# Altium PCB 密码球锁202061.PcbDoc (part 1 of 2)
Units mm, origin at the board's own origin, x right, y up, seen from the top; angles counter-clockwise.
Board outline 49.08 x 48.4 mm, 2 copper layers (Top, Bottom), stack 0.323 mm thick; 66 components, 39 nets, 195 pads, 129 vias.
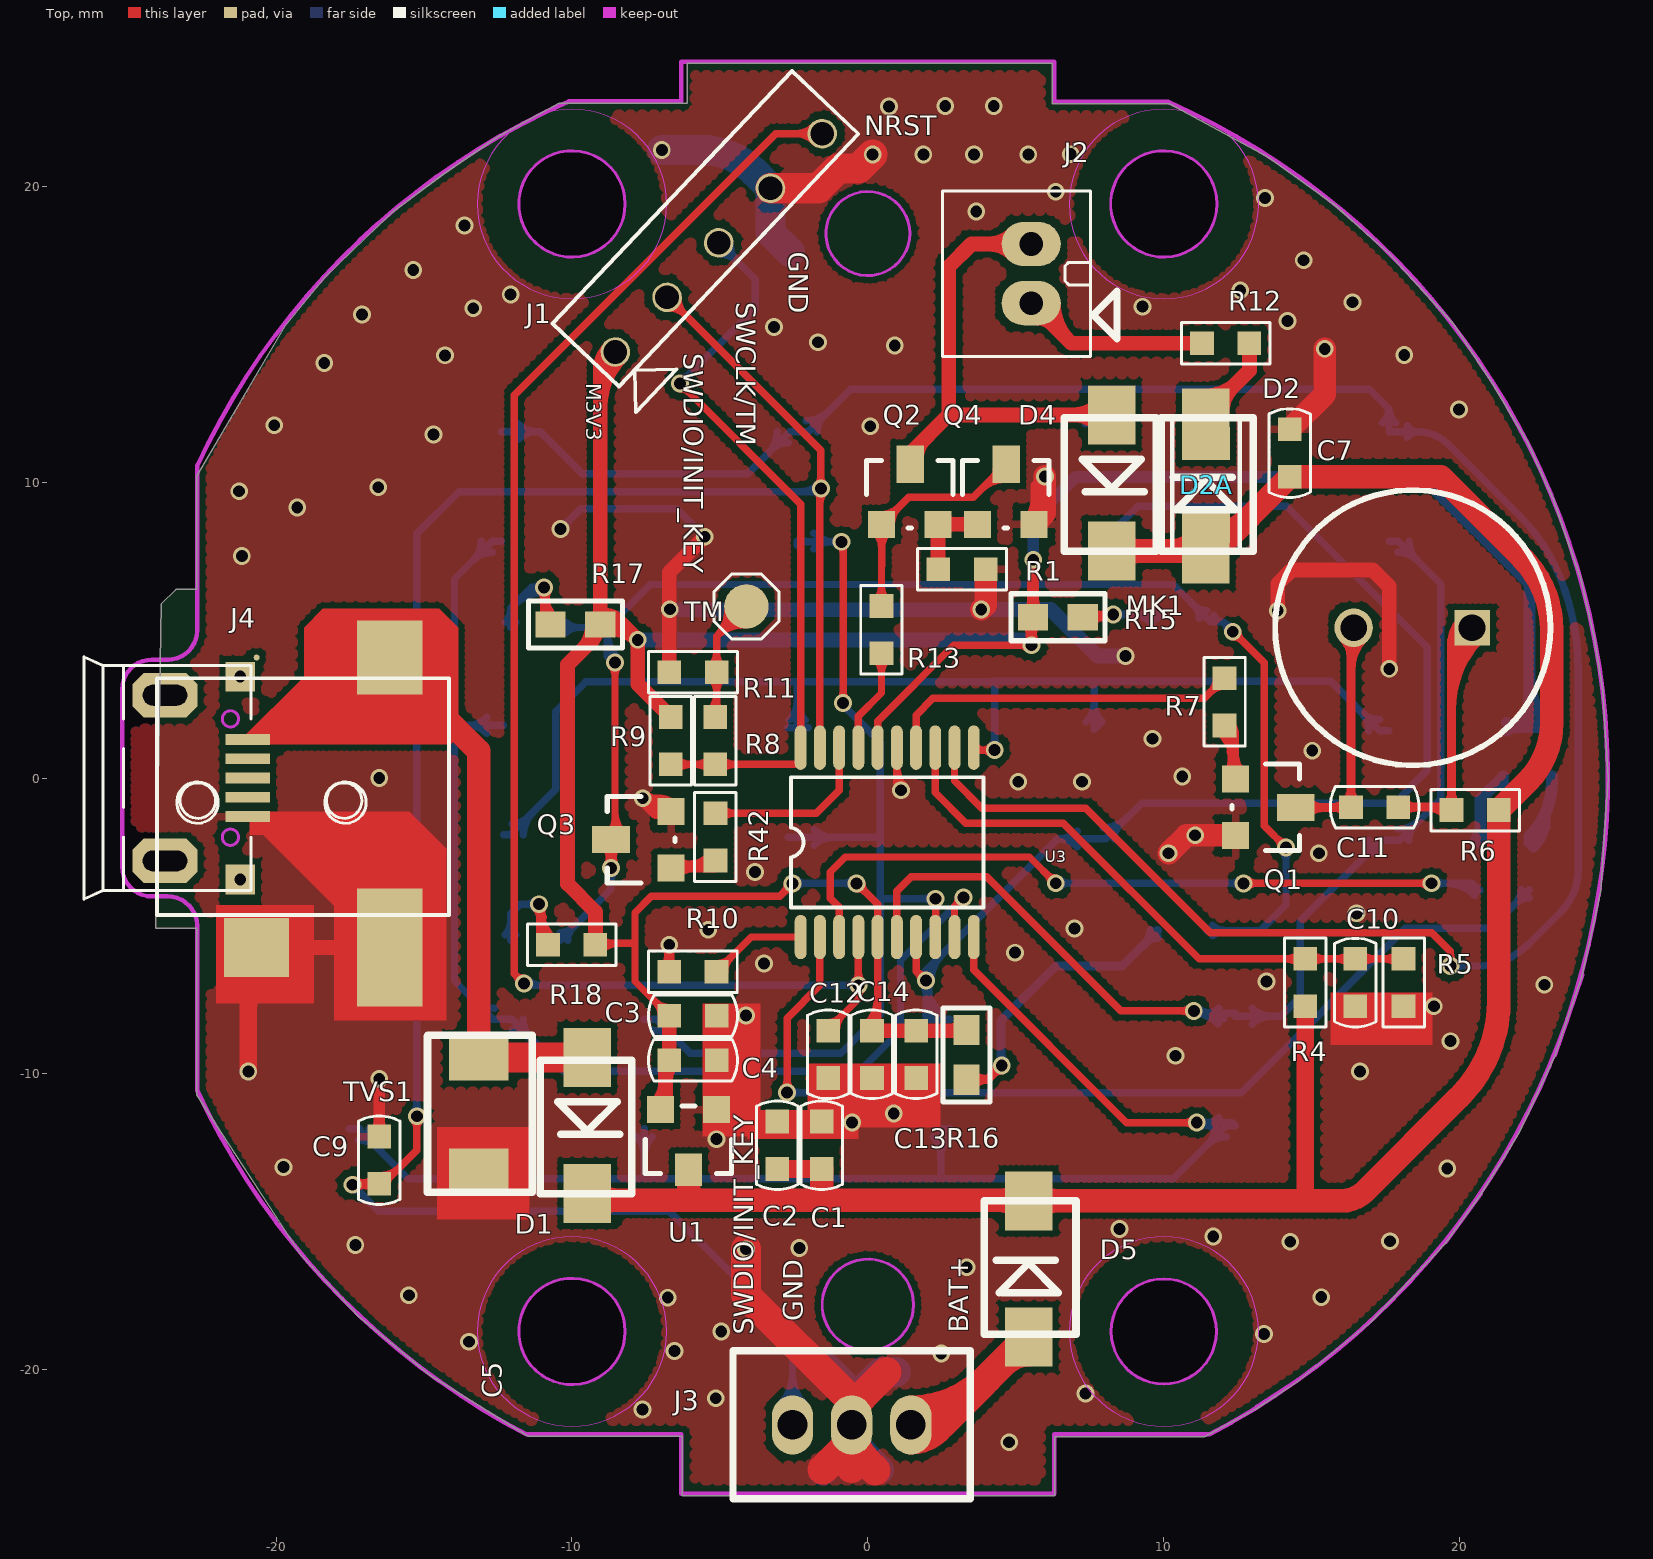
[diagram p0: Top view]
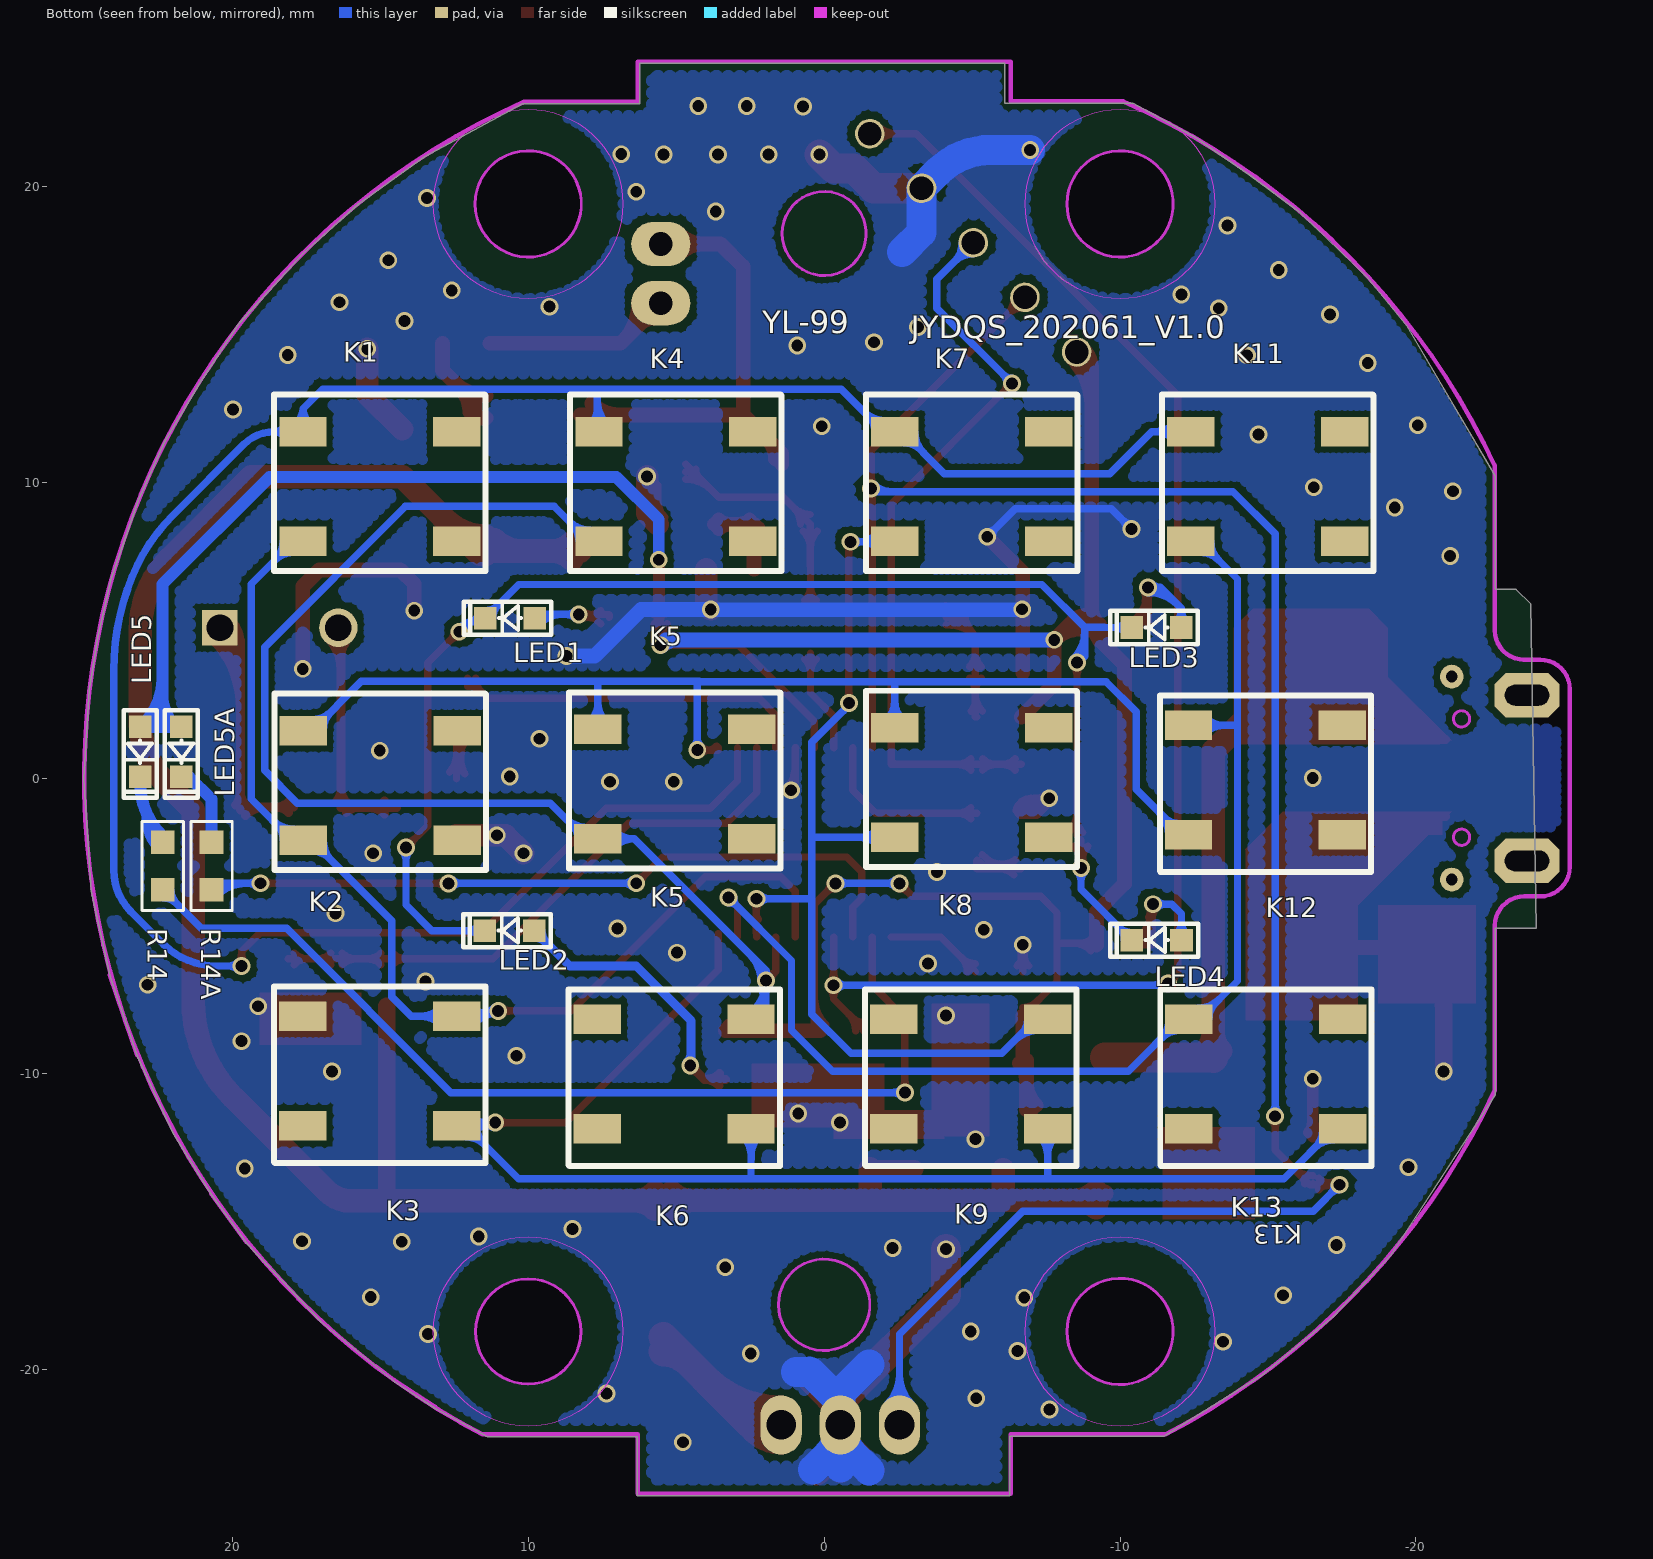
[diagram p1: Bottom view, seen from below]

## Layer stack, top to bottom
Top: signal copper 0.0343
Dielectric: dielectric 0.254, FR-4, Dk 4.3
Bottom: signal copper 0.0343

## Board outline
-6.096,24.147 6.224,24.147 6.224,22.791 10.191,22.791 13.504,20.997 15.724,19.407 17.614,17.727 19.744,15.387 21.044,13.427 22.284,11.367 23.174,9.377 24.114,6.687 24.544,4.747 24.834,2.977 25.014,-0.023 24.764,-3.823 24.124,-6.713 23.194,-9.433 21.994,-12.013 20.694,-14.093 19.484,-15.753 17.014,-18.363 14.524,-20.393 13.124,-21.313 11.374,-22.253 6.314,-22.253 6.314,-24.253 -6.276,-24.253 -6.276,-22.243 -11.486,-22.243 -14.796,-20.183 -17.206,-18.193 -19.156,-16.113 -22.682,-10.716 -22.682,-5.082 -24.066,-5.082 -23.883,5.882 -23.383,6.374 -22.682,6.374 -22.682,10.2 -19.696,15.277 -18.346,16.927 -16.096,19.097 -14.366,20.387 -12.536,21.657 -10.434,22.802 -6.096,22.802

## Design rules (kind name [scope] priority, off if disabled: settings)
Clearance Clearance_1 [InComponent('J4')] p1: gap=0.178
Clearance [All] p2: gap=0.203
ComponentClearance [All] p1: gap=0 collisioncheckmode=3 verticalgap=0 showdistances=FALSE
HoleSize [All] p1: absolutevalues=TRUE maxlimit=12.7 minlimit=0.025 maxpercent=80.000 minpercent=20.000
HoleToHoleClearance [All] p1: gap=0 allowstackedmicrovias=TRUE
MinimumSolderMaskSliver [All] p1: minsoldermaskwidth=0
PolygonConnect PolygonConnect_1 [IsVia] p1: connectstyle=Direct reliefconductorwidth=0.254 reliefentries=4 polygonreliefangle="90 Angle" airgapwidth=0.254
PolygonConnect [All] p2: connectstyle=Relief reliefconductorwidth=0.254 reliefentries=4 polygonreliefangle="90 Angle" airgapwidth=0.254
RoutingVias [All] p1: holewidth=7.112 width=12.7 viastyle="Through Hole" minholewidth=0.203 minwidth=0.254 maxholewidth=0.711 maxwidth=1.27
SilkToSilkClearance [All] p1: silktosilkclearance=0
SilkToSolderMaskClearance SilkscreenOverComponentPads [IsPad] p1: minsilkscreentomaskgap=-10 clearancetoexposedcopper=TRUE
SolderMaskExpansion [All] p1: expansion=0.102
Width [All] p1: maxlimit=2.032 minlimit=0.203 preferedwidth=0.254
22 further rules are at their usual default settings.

## Components (designator, comment, footprint, x,y, rotation, side; value= is the part's Value field where it differs from the comment)
C1 "10uF" C0603 -1.563,-12.409 r90 top
C2 "100nF" C0603 -3.057,-12.409 r90 top
C3 "10uF" C0603 -5.91,-8.032 r0 top
C4 "100nF" C0603 -5.91,-9.534 r0 top
C5 "" DC_4P_4.5 -16.155,-5.728 r90 top
C7 "100nF" C0603 14.254,10.981 r270 top
C9 "10nF" C0603 -16.515,-12.915 r90 top
C10 "10nF" C0603 16.472,-6.911 r270 top
C11 "10uF" C0603 17.124,-0.983 r0 top
C12 "100NF" C0603 -1.339,-9.337 r90 top
C13 "1UF" C0603 1.631,-9.337 r90 top
C14 "100NF" C0603 0.138,-9.337 r90 top
D1 "SS14" DO-214AC(SMA) -9.477,-9.443 r270 top
D2 "RB160" DO-214AC(SMA) 11.421,7.572 r90 top
D2A "0R" 1206R 11.43,9.906 r90 top
D4 "4148" DO-214AC(SMA) 8.244,12.272 r270 top
D5 "ss14" DO-214AC(SMA) 5.433,-18.888 r90 top
J1 "2.54mm烧录口" 5P-2.54 -8.532,14.398 r46.55 top
J2 "离合器线圈接口" 2PIN-2.0 5.518,17.047 r90 top
J3 "Header 3" 3PIN-2.0J -0.547,-21.858 r180 top
J4 "MICRO_USB" MICRO-USB_F-B -22.352,0 r270 top
K1 "SW" KEY_4_4_1.5 17.61,11.704 r180 bottom
K2 "SW" KEY_4_4_1.5 17.599,1.603 r180 bottom
K3 "SW" KEY_4_4_1.5 12.418,-11.749 r0 bottom
K4 "SW" KEY_4_4_1.5 7.61,11.704 r180 bottom
K5 "SW" KEY_4_4_1.5 7.644,1.643 r180 bottom
K6 "SW" KEY_4_4_1.5 2.469,-11.853 r0 bottom
K7 "SW" KEY_4_4_1.5 -2.39,11.704 r180 bottom
K8 "SW" KEY_4_4_1.5 -2.386,1.697 r180 bottom
K9 "SW" KEY_4_4_1.5 -7.552,-11.853 r0 bottom
K11 "SW" KEY_4_4_1.5 -12.39,11.704 r180 bottom
K12 "SW" KEY_4_4_1.5 -17.511,-1.917 r0 bottom
K13 "SW" KEY_4_4_1.5 -17.525,-11.853 r0 bottom
LED1 "blue" LED0603 10.613,5.405 r180 bottom
LED2 "blue" LED0603 10.628,-5.155 r180 bottom
LED3 "blue" LED0603 -11.233,5.088 r180 bottom
LED4 "blue" LED0603 -11.239,-5.475 r180 bottom
LED5 "GREEN" LED0603 23.114,0.889 r90 bottom
LED5A "RED" LED0603 21.717,0.889 r90 bottom
MK1 "BUZZER" BUZZER_D93_L40 18.415,5.08 r180 top
Q1 "8050" SOT-23 12.424,-0.033 r270 top
Q2 "8050" SOT-23 0.466,8.574 r0 top
Q3 "8050" SOT-23 -6.648,-3.041 r90 top
Q4 "8050" SOT-23 3.71,8.574 r0 top
R1 "0R" R0603 3.179,7.059 r0 top
R4 "2M 1%" R0603 14.782,-6.91 r270 top
R5 "1M,1%" R0603 18.102,-6.91 r90 top
R6 "51R" R0603 20.524,-1.083 r180 top
R7 "1K" R0603 12.053,2.578 r90 top
R8 "22R" R0603 -5.158,1.263 r270 top
R9 "10K" R0603 -6.659,1.263 r90 top
R10 "10K" R0603 -5.914,-6.546 r0 top
R11 "ESD" R0603 -5.911,3.571 r0 top
R12 "0R" R0603 12.092,14.695 r0 top
R13 "1k" R0603 0.46,5.014 r270 top
R14 "1K" R0603 22.348,-2.974 r90 bottom
R14A "1K" R0603 20.701,-2.974 r270 bottom
R15 "100R" R0603D 6.424,5.437 r0 top
R16 "100R" R0603D 3.33,-9.357 r270 top
R17 "100R" R0603D -9.882,5.188 r180 top
R18 "100R" R0603 -10.008,-5.638 r0 top
R42 "4.7K" R0603 -5.151,-1.988 r270 top
TM "" TP1M5 -4.103,5.799 r0 top
TVS1 "SMCJ6.0CA" SMC/DO-214AB-XIAO -13.151,-9.463 r270 top
U1 "JC5333" SOT-23-3L -6.06,-12.222 r180 top
U3 "STM32F030F4P6" TSSOP20 0.654,-2.173 r90 top

## Footprints (in the part's own frame and the unit in brackets; to place one, negate y for a bottom-side part, rotate by r counter-clockwise, add the part's x,y. Pads: shape width x height; smd on the part's side, far side on the other; paste and mask are expansions set on the pad)
2PIN-2.0 [mm]
  oval 1.5x2 hole 0.8: 1(-1,0) 2(1,0)
  silkscreen extent -2.8,-2.9 2.79,3
3PIN-2.0J [mm]
  oval 1.4x2 hole 1: 1(-2,0) 2(0,0) 3(2,0)
  silkscreen extent -4.01,-2.5 4.01,2.49
5P-2.54 [mm]
  round 1 hole 0.8: 1(0,0) 2(2.54,0) 3(5.08,0) 4(7.62,0) 5(10.16,0)
  silkscreen extent -1,-1.9 11,2.2
1206R [mil]
  rect 44x64 smd mask+1.97: 1(-55,0) 2(55,0)
  silkscreen extent -90,-45 90,45
BUZZER_D93_L40 [mm]
  rect 1.2x1.2 hole 0.9: 1(-2,0)
  round 1.3 hole 0.9: 2(2,0)
  silkscreen extent -4.65,-4.65 4.65,4.65
C0603 [mm]
  rect 0.8x0.8 smd: 1(-0.8,0) 2(0.8,0)
  silkscreen extent -1.5,-0.7 1.5,0.7
DC_4P_4.5 [mm]
  rect 4x2.2 smd: 1(0,0)
  rect 2x2.2 smd: 2(0,4.5)
  round 0.2 smd: 3(9.8,4.5)
  rect 2.5x2.2 smd: 4(9.8,0)
  silkscreen extent 1.1,-2 9.1,7.86
DO-214AC(SMA) [mm]
  rect 2x1.6 smd: 1(0,0) 2(4.6,0)
  silkscreen extent 0.1,-1.6 4.6,1.5
KEY_4_4_1.5 [mm]
  rect 1.6x1 smd: 1(0,0) 2(5.2,0) 3(0,-3.7) 4(5.2,-3.7)
  silkscreen extent -0.98,-4.71 6.17,1.25
LED0603 [mil]
  rect 30x30 smd: 1(33,0) 2(-33,0)
  silkscreen extent -62,-22 55,22
MICRO-USB_F-B [mm]
  rect 0.36x1.5 smd mask+0.05: 1(-1.3,1.4) 2(-0.65,1.4) 3(0,1.4) 4(0.65,1.4) 5(1.3,1.4)
  oct 1.5x2.2 hole 0.7 slot 1.5 at 90 deg mask+0.05: 6(2.8,-1.4) 7(-2.8,-1.4)
  rect 1x1 / inner rect 0.8x0.8 / far side round 0.8 hole 0.4 unplated: 8(3.429,1.143) 9(-3.429,1.143)
  Keep-Out Layer circle w0.1: c-2,0.813 r0.275
  Keep-Out Layer circle w0.1: c2,0.813 r0.275
  silkscreen extent -4.1,-4.14 4.1,1.5
R0603 [mm]
  rect 0.8x0.8 smd: 1(-0.8,0) 2(0.8,0)
  silkscreen extent -1.5,-0.7 1.5,0.7
R0603D [mil]
  rect 40x35 smd: 1(-33,0) 2(33,0)
  silkscreen extent -62,-31 62,31
SMC/DO-214AB-XIAO [mm]
  rect 1.5x2 smd: 1(0,0) 2(3.8,0)
  silkscreen extent -0.77,-1.73 4.54,1.81
SOT-23 [mil]
  rect 36x36 smd: 1(0,0) 2(75,0)
  rect 36x50 smd: 3(38,80)
  silkscreen extent -20,-5 95,85
SOT-23-3L [mil]
  rect 36x36 smd: 1(-37.4,-40) 2(37.4,-40)
  rect 36x43.31 smd: 3(0,40)
  silkscreen extent -57,-45 58,45
TP1M5 [mm]
  round 1.5 smd: 1(0,0)
  silkscreen extent -1.1,-1.1 1.1,1.1
TSSOP20 [mm]
  oval 1.5x0.4 smd: 1(-3.2,2.925) 2(-3.2,2.275) 3(-3.2,1.625) 4(-3.2,0.975) 5(-3.2,0.325) 6(-3.2,-0.325) 7(-3.2,-0.975) 8(-3.2,-1.625) 9(-3.2,-2.275) 10(-3.2,-2.925) 11(3.2,-2.925) 12(3.2,-2.275) 13(3.2,-1.625) 14(3.2,-0.975) 15(3.2,-0.325) 16(3.2,0.325) 17(3.2,0.975) 18(3.2,1.625) 19(3.2,2.275) 20(3.2,2.925)
  silkscreen extent -2.2,-3.25 2.2,3.25

## Part data
C1 C2 C3 C4 C7 C9 C12 C13 C14: library part "CAP NP"
C5: library part "Header 4", "Header, 2-Pin"
C10: library part C_0, "?"
C11: library part C_0_Dup1
D1 D2 D4 D5: library part D
D2A R12: library part Res0603
J1: library part "Header 5", "Header, 5-Pin"
J2: library part "Header 2", "Header, 2-Pin"
J3: "Header, 3-Pin"
K1 K2 K3 K4 K5 K6 K7 K8 K9 K11 K12 K13: "Switch"
LED1 LED2 LED3 LED4 LED5 LED5A: library part LED
MK1: library part MICROPHONE_0
Q1: library part PMBT3904_Dup1
Q2 Q4: library part NPN_BJT, "Bipolar Junction Transistor"
Q3: library part PMBT3904
R1 R8 R9 R11 R13: library part Res2, "Resistor"
R4 R5: library part R_Dup2
R6 R7 R10 R14 R14A: library part R_Dup1
R15 R16 R17 R18 R42: library part R
TM: library part TOUCH-BELL
TVS1: library part TVS
U1: library part XC6206P302M
U3: library part Component_1

## Free pads (board coordinates)
  round 0.254 hole 3.6: 1(-10,-18.7) 2(-10,19.4) 3(10,19.4) 4(10,-18.7)

## Via types
v1: diameter 0.6/0.6 (per signal layer), hole 0.4, Top to Bottom, 122 vias
v2: diameter 0.6, hole 0.4, Top to Bottom, tented both sides, 4 vias
v3: diameter 0.61, hole 0.406, Top to Bottom, tented both sides, 3 vias

## Nets (pads, with @x,y where several pads share a name; then routed paths per layer and width w, separated by ;. In a path a pad name is that pad's centre, name@x,y a point inside that pad or via, vN(x,y) a via of type N, cw(c..) or ccw(c..) an arc to the next point about the centre after c; other vN are vias at no path point)
BAT+: C1.1 C2.1 C7.2 D1.2 D2.1 D2A.1 D4.2 D5.2 R4.2 R6.1 U1.3 | length 86.2
  Top w0.6: D1.2@-9.477,-14.043 D1.2@-9.249,-14.271 ; U1.3@-6.06,-13.238 U1.3@-6.06,-13.238 ; C2.1@-3.057,-13.209 -2.957,-13.209 C1.1@-1.563,-13.209 ; -1.563,-14.243 -1.544,-14.263 -1.094,-14.263 -1.102,-14.271 ; D5.2@5.433,-14.288 D5.2@5.433,-14.263 ; 14.662,-14.288 14.782,-14.168 R4.2@14.782,-7.71
  Top w0.8: D1.2@-9.249,-14.271 -6.058,-14.271 ; D1.2@-9.195,-14.525 cw(c-8.579,-15.141) -8.579,-14.271 ; D1.2@-9.195,-13.96 ccw(c-8.444,-13.209) -8.444,-14.271 ; U1.3@-6.06,-13.238 -6.058,-14.271 ; -1.563,-14.243 C1.1@-1.563,-13.209 ; -1.102,-14.271 -6.058,-14.271 ; -1.094,-14.263 D5.2@5.433,-14.263 ; 4.407,-14.263 cw(c4.407,-15.314) D5.2@5.15,-14.571 ; 4.528,-14.263 ccw(c4.528,-13.383) D5.2@5.15,-14.005 ; D5.2@5.433,-14.288 14.662,-14.288 15.999,-14.288 ccw(c15.999,-13.143) 16.808,-13.953 19.979,-10.781 ccw(c16.733,-7.535) 21.324,-7.535 R6.1@21.324,-1.083 22.29,-0.117 ccw(c20.321,1.852) 23.105,1.852 23.105,5.009 ccw(c19.658,5.009) 22.096,7.446 19.36,10.181 C7.2@14.254,10.181 11.633,7.56 11.633,7.572 D2.1@11.421,7.572 ; D5.2@5.716,-14.571 cw(c6.399,-15.253) 6.399,-14.288 cw(c6.399,-13.322) D5.2@5.716,-14.005 ; D4.2@8.244,7.672 11.421,7.672 D2.1@11.421,7.572 ; D4.2@8.527,7.389 cw(c9.209,6.706) 9.209,7.672 cw(c9.209,8.637) D4.2@8.527,7.955 ; 10.214,7.672 ccw(c10.214,8.979) D2A.1@11.138,8.054 ; D2.1@11.421,7.772 D2.1@11.421,7.572 ; D2A.1@11.421,8.172 ccw(c11.421,10.158) 12.826,8.754
BAT_DET: C10.1 R4.1 R5.2 U3.13 | length 24.9
  Top w0.25: U3.13@2.279,1.027 2.279,-0.489 3.314,-1.524 6.604,-1.524 11.19,-6.11 R4.1@14.782,-6.11 14.783,-6.111 C10.1@16.472,-6.111 ; R4.1@14.587,-6.305 ccw(c14.118,-6.774) 14.118,-6.11 ccw(c14.118,-5.446) R4.1@14.587,-5.916 ; R4.1@14.976,-6.305 cw(c15.443,-6.772) 15.443,-6.111 ; R4.1@14.976,-5.916 ccw(c15.448,-5.444) 15.448,-6.111 ; C10.1@16.277,-6.306 ccw(c15.808,-6.775) 15.808,-6.111 ccw(c15.808,-5.447) C10.1@16.277,-5.917 ; C10.1@16.472,-6.111 R5.2@18.102,-6.11 ; C10.1@16.666,-6.306 cw(c17.138,-6.778) 17.138,-6.11 ; C10.1@16.666,-5.917 ccw(c17.133,-5.45) 17.133,-6.11 ; R5.2@17.907,-6.305 ccw(c17.438,-6.774) 17.438,-6.11 ccw(c17.438,-5.446) R5.2@17.907,-5.916
BLACKLIGHT: R42.1 U3.18 | length 7
  Top w0.25: R42.1@-5.151,-1.188 -1.749,-1.188 -0.971,-0.411 U3.18@-0.971,1.027 ; R42.1@-4.957,-1.383 cw(c-4.487,-1.852) -4.487,-1.188 cw(c-4.487,-0.524) R42.1@-4.957,-0.994
BUZZER: R7.2 U3.14 | length 13.1
  Top w0.25: U3.14@1.629,1.027 1.629,2.127 2.199,2.697 11.372,2.697 R7.2@12.053,3.378 ; R7.2@11.778,3.378 cw(c11.114,3.378) 11.583,2.908 cw(c12.053,2.439) R7.2@12.053,3.103
GND: C1.2 C2.2 C3.2 C4.2 C5.1 C5.2 C7.1 C9.2 C10.2 C12.1 C13.1 C14.1 J1.4 J3.2 J4.5 Q1.2 Q3.2 Q4.2 R1.2 R5.1 R10.1 R11.1 TVS1.2 U1.1 U3.15 | length 166.2
  Top w0.25: v1(-7.608,-0.682) -7.608,-0.683 cw(c-7.608,-1.33) Q3.2@-6.973,-1.202 ; v1@-7.606,-0.683 -7.101,-0.683 Q3.2@-6.648,-1.136 ; v1@-7.496,-0.817 cw(c-7.344,-1.001) -7.282,-0.77 cw(c-7.221,-0.542) v1@-7.443,-0.622 ; v1@-7.484,-0.805 cw(c-7.188,-1.101) -7.188,-0.683 ; v1@-7.484,-0.558 ccw(c-7.182,-0.256) -7.182,-0.683 ; -7.302,-0.683 cw(c-7.302,-1.268) Q3.2@-6.728,-1.152 ; Q3.2@-6.996,-0.683 cw(c-6.996,-1.206) Q3.2@-6.483,-1.103 ; R10.1@-6.909,-6.351 ccw(c-7.379,-5.881) v1@-6.714,-5.881 ; v1@-6.851,-5.742 cw(c-7.172,-6) -6.774,-6.106 ; v1@-6.838,-5.756 cw(c-7.136,-6.055) -6.714,-6.055 cw(c-6.291,-6.055) v1@-6.59,-5.756 ; R10.1@-6.714,-6.546 v1(-6.714,-5.633) ; v1@-6.714,-5.883 ccw(c-6.052,-5.883) R10.1@-6.52,-6.351 ; -6.654,-6.106 cw(c-6.258,-6) v1@-6.578,-5.742 ; C2.2@-3.057,-11.609 C1.2@-1.563,-11.609 -1.563,-11.637 v1(-0.532,-11.637) ; C2.2@-2.863,-11.803 cw(c-2.393,-12.273) -2.393,-11.609 cw(c-2.393,-10.945) C2.2@-2.863,-11.414 ; C1.2@-1.758,-11.803 ccw(c-2.227,-12.273) -2.227,-11.609 ccw(c-2.227,-10.945) C1.2@-1.758,-11.414 ; C1.2@-1.369,-11.803 cw(c-0.967,-12.205) -0.967,-11.637 ; C1.2@-1.369,-11.414 ccw(c-0.832,-10.877) -0.832,-11.637 ; C12.1@-1.339,-10.137 C14.1@0.138,-10.137 0.856,-10.137 ; C12.1@-1.144,-10.331 cw(c-0.675,-10.801) -0.675,-10.137 cw(c-0.675,-9.473) C12.1@-1.144,-9.942 ; v1@-0.655,-11.76 ccw(c-0.954,-12.059) -0.954,-11.637 ccw(c-0.954,-11.214) v1@-0.655,-11.513 ; C14.1@-0.056,-10.331 ccw(c-0.526,-10.801) -0.526,-10.137 ccw(c-0.526,-9.473) C14.1@-0.056,-9.942 ; C14.1@0.333,-10.331 cw(c0.802,-10.801) 0.802,-10.137 cw(c0.802,-9.473) C14.1@0.333,-9.942 ; v1@0.752,-11.216 ccw(c0.499,-10.964) 0.856,-10.964 ; v1@0.776,-11.403 0.792,-11.403 0.802,-11.413 v1(0.876,-11.34) 0.856,-11.415 0.856,-10.137 ; 0.856,-10.871 ccw(c1.344,-10.871) v1@0.999,-11.216 ; U3.15@0.955,1.027 U3.15@0.979,1.027 0.979,-0.163 1.104,-0.373 1.134,-0.403 v1(1.124,-0.413) ; U3.15@0.979,0.36 ccw(c1.896,0.36) v1@1.247,-0.289 ; C13.1@1.436,-10.331 ccw(c0.967,-10.801) 0.967,-10.137 ccw(c0.967,-9.473) C13.1@1.436,-9.942 ; C13.1@1.631,-10.137 0.856,-10.137 ; Q4.2@5.38,8.809 ccw(c4.813,9.376) 5.615,9.376 ccw(c6.417,9.376) Q4.2@5.85,8.809 ; Q4.2@5.615,8.574 5.615,9.897 ; 5.737,10.02 ccw(c5.564,10.194) v1@5.809,10.194 ; v1@5.965,10.02 ccw(c5.917,9.596) 5.615,9.897 ; v1(5.984,10.194) 5.924,10.177 5.895,10.177 5.615,9.897 ; v1(11.059,-1.932) 12.424,-1.933 Q1.2@12.424,-1.938 ; v1@11.182,-2.055 cw(c11.479,-2.352) 11.479,-1.933 ; v1@11.182,-1.808 ccw(c11.484,-1.507) 11.484,-1.933 ; 11.61,-1.933 cw(c11.61,-2.752) Q1.2@12.189,-2.173 ; 11.634,-1.933 ccw(c11.634,-1.148) Q1.2@12.189,-1.703 ; C10.2@16.472,-7.711 R5.1@18.102,-7.71 v1(19.126,-7.71) ; C10.2@16.666,-7.906 cw(c17.138,-8.378) 17.138,-7.71 ; C10.2@16.666,-7.517 ccw(c17.133,-7.05) 17.133,-7.71 ; R5.1@17.907,-7.905 ccw(c17.438,-8.374) 17.438,-7.71 ccw(c17.438,-7.046) R5.1@17.907,-7.516 ; R5.1@18.296,-7.905 cw(c18.767,-8.375) 18.767,-7.71 ; R5.1@18.296,-7.516 ccw(c18.765,-7.048) 18.765,-7.71 ; v1@19.002,-7.834 ccw(c18.703,-8.132) 18.703,-7.71 ccw(c18.703,-7.287) v1@19.002,-7.586
  Top w0.3: J4.5@-21,-1.3 -19.147,-1.3 -16.51,-3.937 -16.51,-5.373 C5.1@-16.155,-5.728 ; -18.156,-2.291 cw(c-20.693,-4.828) C5.1@-17.105,-4.828 ; -17.644,-2.803 cw(c-19.669,-4.828) C5.1@-16.805,-4.828 ; -17.132,-3.315 cw(c-18.644,-4.828) C5.1@-16.505,-4.828 ; -16.862,-3.585 ccw(c-16.155,-2.878) C5.1@-16.155,-3.878 ; C5.1@-16.62,-3.827 cw(c-17.62,-4.828) C5.1@-16.205,-4.828 ; v1@3.723,5.803 ccw(c3.196,6.33) 3.942,6.33 ; R1.2@3.802,6.882 cw(c3.466,6.545) 3.942,6.545 ; v1(3.829,5.697) 3.942,5.697 3.942,5.809 3.942,7.059 R1.2@3.979,7.059 ; 3.942,6.365 cw(c4.673,6.365) R1.2@4.156,6.882
  Top w0.4: C9.2@-16.657,-11.973 ccw(c-17.01,-11.619) -16.51,-11.619 ; C9.2@-16.515,-12.115 -16.51,-12.109 v1(-16.51,-10.16) ; -16.51,-11.644 ccw(c-16.045,-11.644) C9.2@-16.374,-11.973
  Top w0.5: C5.2@-20.655,-5.728 C5.1@-16.155,-5.728 ; C5.2@-20.025,-6.258 cw(c-18.745,-7.538) -18.745,-5.728 cw(c-18.745,-3.917) C5.2@-20.025,-5.197 ; C5.1@-16.756,-6.329 ccw(c-18.207,-7.78) -18.207,-5.728 ccw(c-18.207,-3.676) C5.1@-16.756,-5.127 ; R11.1@-6.711,3.571 -6.711,6.953 v1(-5.512,8.152) ; U1.1@-5.256,-11.353 cw(c-5.604,-11.701) -5.112,-11.701 ; U1.1@-5.256,-11.06 ccw(c-5.609,-10.707) -5.11,-10.707 ; v1(-5.112,-12.203) -5.112,-11.206 U1.1@-5.11,-11.206 ; -5.112,-11.712 cw(c-4.604,-11.712) U1.1@-4.963,-11.353 ; U1.1@-5.11,-11.206 C4.2@-5.11,-9.534 ; -5.11,-10.705 ccw(c-4.609,-10.705) U1.1@-4.963,-11.06 ; C4.2@-5.11,-9.534 C3.2@-5.11,-8.032 -5.11,-8.026 v1(-4.12,-8.026) ; v1(13.851,5.657) 13.851,6.566 14.315,7.029 17.061,7.029 17.616,6.474 v1(17.616,3.69)
  Top w0.508: v1(-7.608,-0.682) -7.606,-0.683 -7.153,-1.136 Q3.2@-6.648,-1.136
  Top w0.6: C5.2@-21.25,-6.223 cw(c-22.012,-6.984) -20.935,-6.984 ; v1(-20.935,-9.915) -20.935,-6.007 C5.2@-20.655,-5.728 ; -20.935,-7.851 cw(c-18.632,-7.851) C5.2@-20.26,-6.223
  Top w0.762: v1(3.829,5.697) 3.942,5.809 3.979,5.846 R1.2@3.979,7.059 ; Q4.2@5.615,8.574 5.984,8.944 v1(5.984,10.194) ; v1(10.16,-2.54) 10.762,-1.938 Q1.2@12.424,-1.938 ; C7.1@14.254,11.781 15.44,12.967 v1(15.44,14.503)
  Top w1.016: v1(-4.119,-15.919) -4.119,-17.471 -0.547,-21.043 J3.2@-0.547,-21.858 ; J1.4@-3.292,19.929 -1.676,19.929 -1.005,20.6 -0.312,20.6 v1(0.161,21.073) ; -1.524,-23.368 -0.924,-22.768 ccw(c-1.835,-21.858) J3.2@-0.547,-21.858 ; -0.547,-23.316 J3.2@-0.547,-21.858 ; 0.254,-23.394 -0.028,-23.112 cw(c1.226,-21.858) J3.2@-0.547,-21.858 ; 0.635,-20.066 -0.116,-20.817 ccw(c0.925,-21.858) J3.2@-0.547,-21.858
  Bottom w0.25: v1(-10.386,8.416) -9.696,9.105 -6.465,9.105 v1(-5.512,8.152) ; v1@-10.386,8.591 ccw(c-10.386,9.013) -10.087,8.715 ccw(c-9.788,8.416) v1@-10.211,8.416 ; v1@-5.687,8.152 ccw(c-6.109,8.152) -5.81,8.451 ccw(c-5.512,8.749) v1@-5.512,8.327
  Bottom w0.5: v1(-6.691,5.705) -6.673,5.687 3.82,5.687 v1(3.829,5.697) 6.183,5.697 7.755,4.125 v1(8.706,4.125)
  Bottom w1.016: v1(-6.962,21.226) -5.641,21.226 cw(c-5.641,18.686) -3.845,20.482 J1.4@-3.292,19.929 -3.292,18.436 -2.635,17.78 ; -1.524,-23.394 -0.943,-22.813 ccw(c-1.897,-21.858) J3.2@-0.547,-21.858 ; -1.524,-19.812 -0.547,-20.789 J3.2@-0.547,-21.077 ; -0.547,-23.304 J3.2@-0.547,-21.858 ; 0.376,-23.368 -0.133,-22.859 cw(c0.869,-21.858) J3.2@-0.547,-21.858 ; 0.942,-20.075 0.455,-20.075 J3.2@-0.547,-21.077 ; J3.2@-0.547,-21.858 J3.2@-0.547,-21.077
  other v1: 4.774,-22.446 -7.62,-21.336 -5.143,-20.959 7.355,-20.795 2.479,-19.443 -6.537,-19.361 -13.482,-19.05 13.388,-18.785 -4.952,-18.706 -6.76,-17.559 15.32,-17.541 -15.511,-17.476 3.339,-16.533 -2.316,-15.878 -17.319,-15.781 14.275,-15.671 17.646,-15.653 11.672,-15.494 8.504,-15.24 19.578,-13.195 -19.747,-13.149 16.634,-9.916 10.398,-9.387 19.685,-8.89 22.86,-6.985 13.467,-6.875 -3.508,-6.269 4.974,-5.9 -5.393,-5.127 6.985,-5.08 16.51,-4.572 -3.81,-3.175 15.24,-2.54 5.08,-0.127 7.239,-0.127 -16.51,0 10.626,0.055 15.018,0.925 9.617,1.326 -21.154,7.499 -19.284,9.141 -21.245,9.689 -16.547,9.826 -14.677,11.605 0.078,11.89 -20.059,11.924 19.978,12.455 -18.372,14.022 -14.293,14.284 18.128,14.292 0.91,14.616 -1.685,14.728 -3.175,15.24 14.18,15.444 -17.094,15.664 -13.335,15.875 9.282,15.93 16.38,16.081 -12.071,16.339 12.581,16.481 -15.361,17.17 14.726,17.499 -13.628,18.675 3.66,19.143 13.417,19.605 6.35,19.812 1.875,21.073 3.588,21.073 5.422,21.073 6.858,21.082 0.715,22.694 2.616,22.706 4.253,22.706
GREEN: R14.1 U3.2 | length 36
  Top w0.25: v1@-2.854,-10.504 ccw(c-3.153,-10.206) -2.73,-10.206 ccw(c-2.308,-10.206) v1@-2.607,-10.504 ; v1(-2.73,-10.628) -2.73,-8.113 -1.621,-7.004 U3.2@-1.621,-5.373
  Bottom w0.25: v1(-2.73,-10.628) 12.611,-10.628 18.159,-5.08 21.042,-5.08 R14.1@22.348,-3.774 ; v1@-2.607,-10.752 cw(c-2.308,-11.051) -2.308,-10.628 cw(c-2.308,-10.206) v1@-2.607,-10.504 ; R14.1@22.073,-3.774 cw(c21.409,-3.774) 21.878,-4.244 cw(c22.348,-4.713) R14.1@22.348,-4.049
KEYX_1: K1.3 K2.3 K3.3 U3.6 | length 45.6
  Top w0.25: U3.6@0.979,-5.373 0.979,-3.821 1.468,-3.332 4.011,-3.332 8.548,-7.87 v1(11.016,-7.87) ; v1@10.892,-7.993 ccw(c10.593,-8.292) 10.593,-7.87 ccw(c10.593,-7.447) v1@10.892,-7.746
  Bottom w0.25: v1(11.016,-7.87) v1@11.016,-7.944 ; v1@11.139,-7.746 ccw(c11.619,-7.267) K3.3@11.619,-7.944 ; v1@11.167,-7.782 ccw(c11.747,-7.448) 11.574,-8.094 ; 11.465,-7.944 ccw(c11.465,-7.397) K3.3@11.853,-7.784 ; 11.59,-7.944 cw(c11.59,-8.54) K3.3@12.026,-8.134 ; K3.3@11.843,-8.305 ccw(c11.016,-9.075) v1@11.016,-7.944 ; K3.3@12.983,-8.314 cw(c13.623,-8.954) 13.623,-8.049 cw(c13.623,-7.144) K3.3@12.983,-7.784 ; 16.635,-2.796 ccw(c15.936,-2.097) K2.3@16.924,-2.097 ; 16.718,-2.713 cw(c17.299,-3.294) K2.3@17.299,-2.472 ; K1.3@17.61,8.004 17.913,8.004 19.36,6.557 19.36,-0.706 17.969,-2.097 K2.3@17.599,-2.097 17.334,-2.097 14.605,-4.826 14.605,-7.391 13.947,-8.049 K3.3@12.418,-8.049 12.418,-7.944 v1@11.016,-7.944 ; K2.3@17.899,-1.722 ccw(c17.899,-0.649) 18.658,-1.408 ; K1.3@17.91,7.629 cw(c17.91,6.714) 18.556,7.361 ; K2.3@18.274,-2.097 cw(c19.012,-2.097) 18.49,-1.576 ; K1.3@18.285,8.004 ccw(c19.181,8.004) 18.547,7.37
KEYX_2: K4.3 K5.3 K6.3 U3.7 | length 52.7
  Top w0.25: U3.7@1.629,-5.373 1.629,-6.533 ; 1.679,-6.583 cw(c1.422,-6.841) v1@1.786,-6.841 ; v1@1.958,-6.666 cw(c1.95,-6.211) 1.629,-6.533 ; v1(1.961,-6.841) 1.963,-6.85 1.949,-6.853 1.629,-6.533
  Bottom w0.25: v1@1.837,-6.964 cw(c1.534,-7.267) 1.963,-7.267 ; v1@1.865,-6.695 ccw(c1.747,-6.516) 1.961,-6.516 ; v1@1.873,-6.992 cw(c1.664,-7.356) 2.069,-7.247 ; v1@1.886,-6.841 cw(c2.49,-6.841) 2.063,-6.414 ; K6.3@1.949,-8 2.101,-8.153 K6.3@2.469,-8.153 ; 1.963,-7.411 ccw(c2.835,-7.411) K6.3@2.252,-8.06 ; 1.963,-7.259 cw(c2.379,-7.259) v1@2.085,-6.964 ; v1@2.057,-6.695 cw(c2.175,-6.516) 1.961,-6.516 ; 2.07,-7.251 cw(c2.481,-7.141) v1@2.112,-6.928 ; v1@2.136,-6.841 cw(c3.343,-6.841) 2.489,-5.987 ; K6.3@2.419,-7.874 cw(c3.338,-6.85) v1@1.963,-6.85 ; K6.3@2.769,-8.153 K6.3@2.469,-8.153 ; K5.3@7.079,-2.322 ccw(c6.439,-2.962) 6.439,-2.057 ccw(c6.439,-1.152) K5.3@7.079,-1.792 ; K4.3@7.91,8.379 ccw(c7.91,9.378) 8.616,8.671 ; K5.3@7.944,-1.682 ccw(c7.944,-0.54) 8.752,-1.348 ; K4.3@7.954,8.127 K4.3@7.61,8.004 7.948,8.004 9.123,9.178 14.15,9.178 18.907,4.421 18.907,0.26 17.801,-0.846 9.253,-0.846 8.042,-2.057 K5.3@7.644,-2.057 6.419,-2.057 1.961,-6.516 ; K4.3@8.285,8.004 cw(c9.096,8.004) 8.522,8.578 ; K5.3@8.319,-2.057 cw(c8.988,-2.057) 8.515,-1.584 ; 1.961,-6.516 v1(1.961,-6.841) v1@1.963,-6.85 ; v1@1.963,-6.85 1.963,-8.153 K6.3@2.469,-8.153
KEYX_3: K7.3 K8.3 K9.3 U3.8 | length 42
  Top w0.25: v1@-0.996,7.982 -0.891,7.982 -0.891,7.91 -0.838,7.858 v1(-0.838,2.54) ; v1@-0.962,2.622 ccw(c-1.261,2.921) -0.838,2.921 ccw(c-0.416,2.921) v1@-0.715,2.622 ; v1@-0.962,7.893 cw(c-1.261,7.595) -0.838,7.595 ; v1@2.158,-4.201 cw(c1.834,-4.526) 2.293,-4.526 ; U3.8@2.226,-4.77 ccw(c2.063,-4.607) 2.293,-4.607 ; U3.8@2.279,-5.373 2.293,-5.146 2.293,-4.058 2.272,-4.037 2.273,-4.078 v1(2.282,-4.077) ; 2.293,-4.474 cw(c2.679,-4.474) v1@2.406,-4.201
  Bottom w0.25: K9.3@-7.552,-8.153 -7.154,-8.153 -6.005,-9.302 -0.91,-9.302 0.416,-7.976 0.416,-4.09 ; K9.3@-7.252,-8.528 cw(c-7.252,-9.669) -6.445,-8.862 ; K9.3@-6.877,-8.153 ccw(c-6.207,-8.153) -6.681,-8.626 ; K8.3@-2.686,-2.003 K8.3@-2.386,-2.003 ; K7.3@-2.386,7.863 K7.3@-2.39,8.004 ; K7.3@-2.086,7.997 K7.3@-2.39,8.004 ; K8.3@-1.966,-2.003 K8.3@-2.386,-2.003 ; K7.3@-1.825,7.739 cw(c-1.238,7.152) -1.238,7.982 ; K7.3@-1.825,8.269 ccw(c-1.132,8.963) v1@-1.132,7.982 ; K8.3@-1.821,-2.268 cw(c-1.181,-2.908) -1.181,-2.003 cw(c-1.181,-1.097) K8.3@-1.821,-1.738 ; v1@-0.993,7.858 ccw(c-1.291,7.559) -1.291,7.982 ccw(c-1.291,8.404) v1@-0.993,8.105 ; v1(-0.889,7.982) -2.39,7.982 K7.3@-2.39,8.004 ; v1@-0.838,2.46 0.416,1.205 0.416,-2.003 ; v1@-0.759,2.556 ccw(c-0.336,2.556) -0.635,2.257 ; v1@2.158,-4.201 ccw(c1.86,-4.5) 1.86,-4.077 ccw(c1.86,-3.655) v1@2.158,-3.954 ; v1(2.282,-4.077) 0.429,-4.077 0.416,-4.09 ; K8.3@-2.386,-2.003 0.416,-2.003 ; 0.416,-4.09 0.416,-2.003
KEYX_4: K11.3 K12.4 K13.4 U3.9 | length 48.1
  Top w0.25: U3.9@2.929,-5.373 2.929,-4.34 v1(3.234,-4.034) ; v1@3.059,-4.034 cw(c2.637,-4.034) 2.936,-4.333 cw(c3.234,-4.632) v1@3.234,-4.209
  Bottom w0.25: -13.351,-7.477 ccw(c-12.625,-6.752) K13.4@-12.625,-7.778 ; -13.23,-7.598 cw(c-13.785,-8.153) K13.4@-13,-8.153 ; K11.3@-13.065,8.004 cw(c-13.971,8.004) -13.331,7.364 cw(c-12.69,6.723) K11.3@-12.69,7.629 ; K12.4@-12.876,1.518 ccw(c-13.517,0.878) -13.517,1.783 ccw(c-13.517,2.688) K12.4@-12.876,2.048 ; K11.3@-12.39,8.004 -12.69,8.004 -13.97,6.724 -13.97,1.778 ; K12.4@-12.311,1.783 -13.965,1.783 -13.97,1.778 ; K13.4@-12.025,-8.528 cw(c-12.025,-9.397) -11.411,-8.782 ; K13.4@-11.65,-8.153 ccw(c-10.709,-8.153) -11.375,-8.818 ; v1@3.059,-4.034 cw(c2.637,-4.034) 2.936,-4.333 cw(c3.234,-4.632) v1@3.234,-4.209 ; v1(3.234,-4.034) 1.101,-6.167 1.101,-8.525 -0.283,-9.909 -10.284,-9.909 -12.04,-8.153 K13.4@-12.325,-8.153 -12.675,-8.153 -13.97,-6.858 -13.97,1.778
KEYY_1: K3.1 K6.1 K9.1 K13.1 U3.10 | length 56.7
  Top w0.25: U3.10@3.579,-5.373 3.579,-5.253 3.579,-6.481 8.741,-11.644 v1(11.111,-11.644) ; v1@10.987,-11.767 ccw(c10.688,-12.066) 10.688,-11.644 ccw(c10.688,-11.221) v1@10.987,-11.52
  Bottom w0.25: K13.1@-17.225,-12.228 cw(c-17.225,-13.133) -16.585,-12.493 cw(c-15.945,-11.853) K13.1@-16.85,-11.853 ; K13.1@-17.166,-11.853 K13.1@-17.525,-11.853 -17.225,-11.853 -15.538,-13.54 -7.552,-13.54 ; K9.1@-7.817,-12.118 cw(c-8.457,-12.758) -7.552,-12.758 cw(c-6.646,-12.758) K9.1@-7.287,-12.118 ; K9.1@-7.552,-11.853 -7.552,-12.884 -7.552,-13.54 ; K6.1@2.204,-12.118 cw(c1.563,-12.758) 2.469,-12.758 cw(c3.374,-12.758) K6.1@2.734,-12.118 ; K6.1@2.769,-11.853 K6.1@2.469,-11.853 2.469,-12.883 2.47,-12.885 2.47,-13.54 ; v1@11.198,-11.795 cw(c11.409,-12.161) 11.519,-11.753 cw(c11.628,-11.345) v1@11.262,-11.556 ; v1@11.234,-11.767 cw(c11.533,-12.066) 11.533,-11.644 cw(c11.533,-11.221) v1@11.234,-11.52 ; 11.467,-11.644 ccw(c11.467,-11.099) K3.1@11.853,-11.484 ; K3.1@11.743,-11.749 cw(c10.837,-11.749) 11.478,-12.389 cw(c12.118,-13.029) K3.1@12.118,-12.124 ; K3.1@11.826,-11.985 ccw(c11.111,-12.564) v1(11.111,-11.644) 12.312,-11.644 K3.1@12.418,-11.749 12.118,-11.749 10.327,-13.54 2.47,-13.54 ; -7.552,-13.54 2.47,-13.54
KEYY_2: K2.1 K5.1 K8.1 K12.2 U3.11 | length 49.3
  Top w0.25: U3.11@3.579,1.027 3.579,0.937 4.284,0.937 v1(4.284,0.947) ; U3.11@3.632,1.08 ccw(c3.977,1.426) 3.977,0.937 ; 3.837,0.937 ccw(c3.837,1.394) v1@4.16,1.071 ; 3.885,0.937 cw(c3.885,0.549) v1@4.16,0.824
  Bottom w0.25: -8.89,3.26 -2.386,3.26 ; K8.1@-2.716,1.697 K8.1@-2.386,1.697 ; K8.1@-2.686,1.697 K8.1@-2.386,1.697 ; K8.1@-2.651,1.962 ccw(c-3.292,2.603) -2.386,2.603 ccw(c-1.481,2.603) K8.1@-2.121,1.962 ; K8.1@-2.016,1.697 K8.1@-2.386,1.697 ; v1@4.16,1.071 ccw(c3.861,1.37) 4.284,1.37 ccw(c4.706,1.37) v1@4.407,1.071 ; v1(4.284,0.947) 4.284,3.243 4.305,3.265 ; K5.1@7.379,1.908 ccw(c6.739,2.548) 7.644,2.548 ccw(c8.549,2.548) K5.1@7.909,1.908 ; K5.1@7.884,1.882 K5.1@7.644,1.643 7.644,2.834 7.649,2.839 7.649,3.265 ; K2.1@16.924,1.603 ccw(c16.019,1.603) 16.659,2.243 ccw(c17.299,2.883) K2.1@17.299,1.978 ; K2.1@17.599,1.603 17.299,1.603 15.637,3.265 7.649,3.265 ; K8.1@-2.386,1.697 -2.386,3.26 ; -2.386,3.26 4.205,3.26 4.21,3.265 4.305,3.265 ; 4.305,3.265 7.649,3.265
  Bottom w0.254: K12.2@-12.311,-1.917 -12.077,-1.917 -10.541,-0.381 -10.541,2.244 -9.525,3.26 -8.89,3.26 ; K12.2@-12.011,-1.544 ccw(c-12.011,-0.802) -11.487,-1.327 ; K12.2@-11.638,-1.917 cw(c-10.579,-1.917) -11.328,-1.168